# Altium PCB Control_Board_Model_C201_FFC_Sens_Conn.PcbDoc (part 9 of 12)
Units mil, origin at the board's own origin, x right, y up, seen from the top; angles counter-clockwise.
Board outline 3937.01 x 2755.91 mil, 6 copper layers (1-SIG-TOP, 2-GND, 3-PWR, 4-SIG-HOR, 5-SIG-VERT, 6-GND-BOT), stack 46.063 mil thick; 497 components, 379 nets, 1804 pads, 1610 vias.
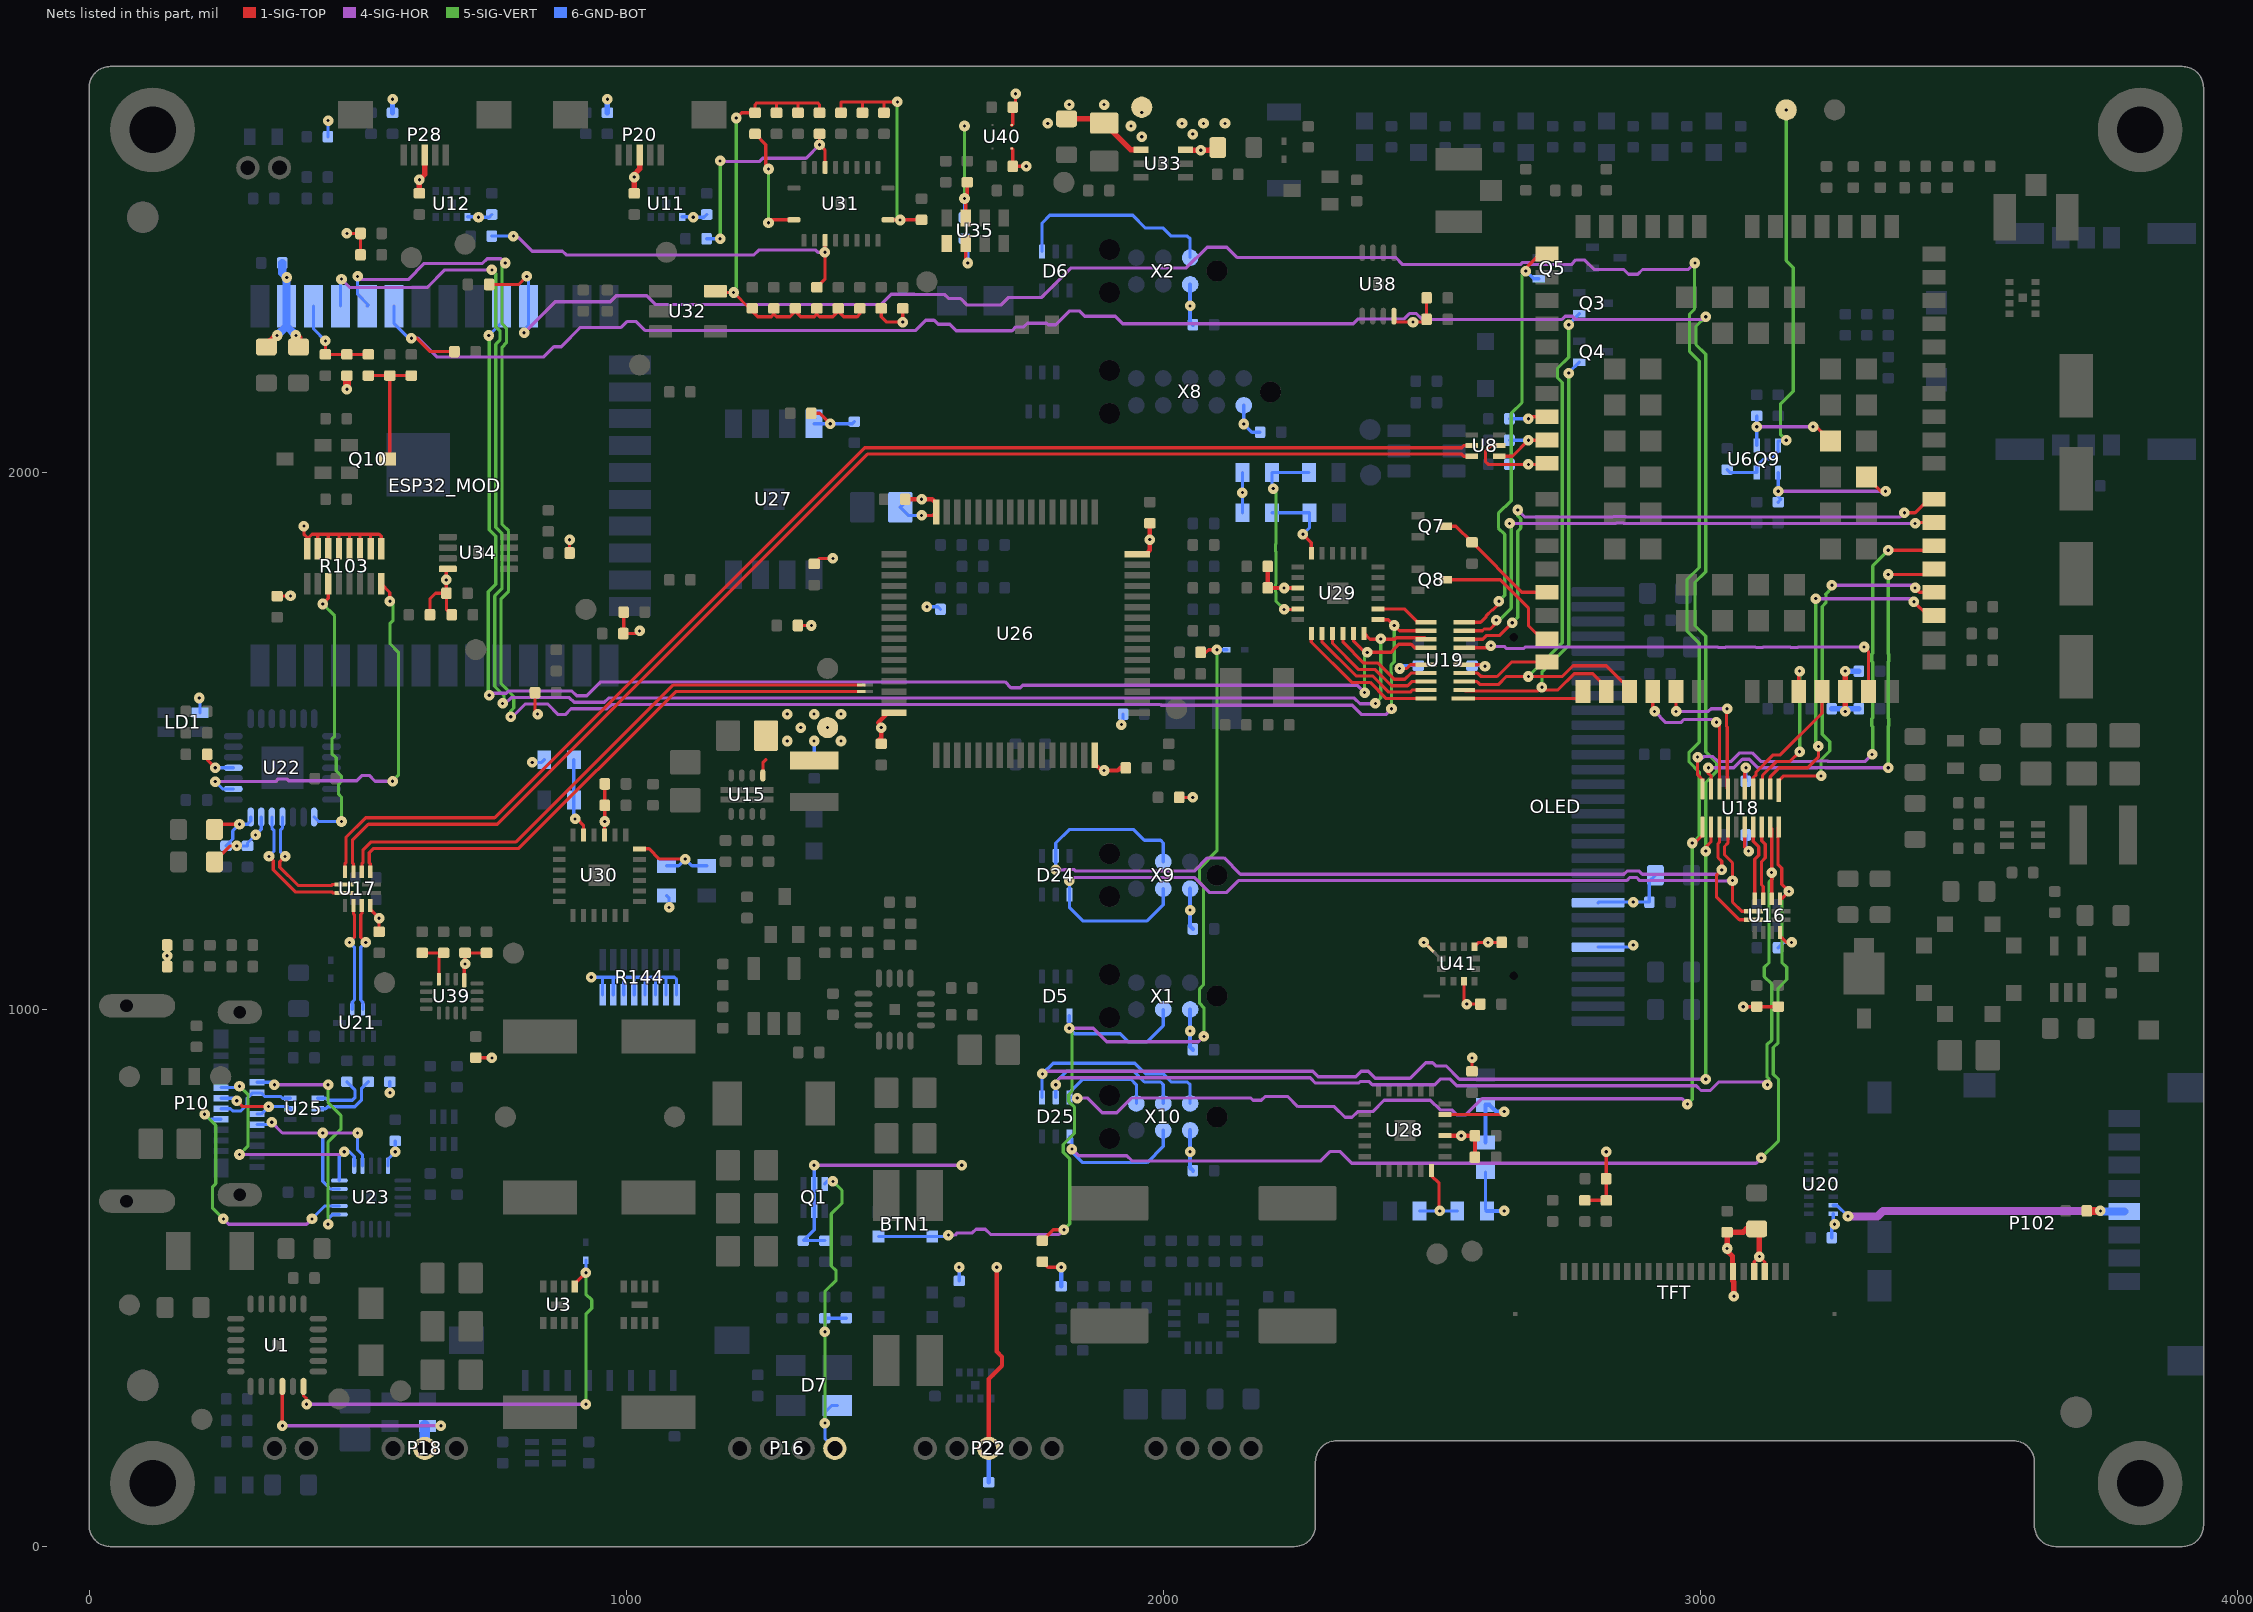
[diagram p8: the nets of this part, all layers, seen from the top]

## Via types
v1: diameter 19.68, hole 5.91, 1-SIG-TOP to 6-GND-BOT, tented both sides, 1553 vias
v2: diameter 23.81, hole 11.81, 1-SIG-TOP to 6-GND-BOT, tented both sides, 27 vias
v3: diameter 23.82, hole 11.81, 1-SIG-TOP to 6-GND-BOT, tented both sides, 26 vias
v4: diameter 21.65, hole 7.87, 1-SIG-TOP to 6-GND-BOT, tented both sides, 4 vias

## Nets (pads, with @x,y where several pads share a name; then routed paths per layer and width w, separated by ;. In a path a pad name is that pad's centre, name@x,y a point inside that pad or via, vN(x,y) a via of type N, cw(c..) or ccw(c..) an arc to the next point about the centre after c; other vN are vias at no path point) (continued)
+3V3: (continued)
  other v1: 2555,765 1300,1500 1400,1500 1325,1525 1375,1525 1300,1550 1350,1550 1400,1550 2055,2630 2035,2650 2075,2650 2115,2650
+3V3_AUX: C46.2 C47.2 C120.2 C123.1 C126.2 P20.3 P28.3 R145.2 R146.2 R147.2 R148.2 R149.2 R150.2 R151.1 R152.1 R153.1 R158.2 R159.1 TP12.1 U32.5 U33.1 U35.7 | length 1469.3
  1-SIG-TOP w6: U32.5@1166.18,2337.41 1168.59,2335 v1(1200,2335) 1229.69,2305.32 C120.2@1235,2305.32 1235,2300 1245,2290 1270,2290 1275,2295 ; v1(1205,2660) 1214.84,2669.84 1240,2669.84 1240,2685 1243,2688 1280,2688 ; R147.2@1275,2305.32 1275,2295 ; R146.2@1280,2669.68 1280,2688 ; R148.2@1315,2305.32 R148.2@1315,2300 ; R145.2@1320,2669.68 1320,2688 ; R153.1@1355,2305.32 1355,2295 ; R151.1@1360,2669.68 1360,2685 1357,2688 1320,2688 ; R149.2@1395,2305.32 R149.2@1395,2300 ; R150.2@1435,2305.32 1435,2295 1430,2290 1405,2290 R149.2@1395,2300 ; U35.7@1632.28,2473.62 1632.28,2507.72 v1(1630,2510) 1635,2515 C126.2@1635,2540.32 ; 1275,2295 1280,2290 1305,2290 R148.2@1315,2300 ; 1280,2688 1320,2688 ; R148.2@1315,2300 1325,2290 1350,2290 1355,2295 ; 1355,2295 1360,2290 1385,2290 R149.2@1395,2300
  1-SIG-TOP w10: C47.2@615,2519.68 v1(615,2545) 625,2555 P28.3@625,2590.94 ; C46.2@1015,2519.68 v1(1015,2550) 1015,2555 1025,2565 P20.3@1025,2590.94 ; C123.1@1820,2658.46 1881.97,2658.46 1939.84,2600.6 U33.1@1958.66,2600.6
  5-SIG-VERT w6: v1(1200,2335) 1205,2340 v1(1205,2660) ; v1(1630,2510) v1(1630,2645)
  6-GND-BOT w6: R159.1@1630,2474.68 v1(1630,2510)
  other v1: 1960,2625 1940,2645 1785,2650 1960,2670 1825,2685 1890,2685
\BG95_PWRKEY: C38.2 Q7.3 U6.15 | length 240.1
  1-SIG-TOP w6: Q7.3@2525.59,1900 2544.68,1900 C38.2@2575,1869.68 2667.72,1776.97 U6.15@2714.76,1776.97
\BG95_RESET: Q8.3 U6.17 | length 253.8
  1-SIG-TOP w6: Q8.3@2525.59,1800 2627.71,1800 2680,1747.71 2680,1715 2704.65,1690.35 U6.17@2714.76,1690.35
\CP2102_RST: R103.8 U22.9 | length 771.7
  1-SIG-TOP w6: R103.8@543.9,1792.5 560,1776.4 v1(560,1760)
  4-SIG-HOR w6: v1(234.94,1424.32) 347.17,1424.32 352.23,1429.38 367.77,1429.38 371.35,1425.8 498.46,1425.8 508.46,1435.8 521.54,1435.8 532.34,1425 v1(565,1425)
  5-SIG-VERT w6: v1(560,1760) 566,1754 566,1724.42 560.16,1718.57 560.16,1681.43 576,1665.58 576,1436 v1(565,1425)
  6-GND-BOT w6: v1(234.94,1424.32) 248.63,1410.63 U22.9@268.5,1410.63
\ESP32_RST: C40.2 ESP32_MOD.3 R59.1 R60.2 | length 179.1
  1-SIG-TOP w6: v1(440,2245) C40.2@440,2219.68 R60.2@480,2219.68 R59.1@520,2219.68
  6-GND-BOT w6: ESP32_MOD.3@417.91,2309.65 417.91,2267.09 v1(440,2245)
\I2C_S1_INT: R74.1 R151.2 U31.7 | length 435.2
  1-SIG-TOP w6: R151.2@1360,2630.32 v1(1360,2610) 1370.47,2599.53 U31.7@1370.47,2567.91
  4-SIG-HOR w6: v1(1175,2580) 1175.84,2579.16 1248.63,2579.16 1254.48,2585 1335,2585 v1(1360,2610)
  5-SIG-VERT w6: v1(1175,2435) v1(1175,2580)
  6-GND-BOT w6: R74.1@1149.69,2435 v1(1175,2435)
\I2C_S2_INT: R152.2 U31.11 | length 227
  1-SIG-TOP w6: R152.2@1240,2630.32 1260,2610.32 1260,2570 v1(1265,2565) ; v1(1265,2465) 1270.47,2470.47 U31.11@1312.4,2470.47
  5-SIG-VERT w6: v1(1265,2465) 1263,2467 1265,2469 v1(1265,2565)
\I2C_S3_INT: R75.1 R153.2 U31.14 | length 744
  1-SIG-TOP w6: R153.2@1355,2344.68 1370,2359.68 v1(1370,2410) 1370.47,2410.47 U31.14@1370.47,2432.09
  4-SIG-HOR w6: v1(790,2440) 785,2440 788,2437 799.97,2437 824.97,2412 881.42,2412 888.42,2405 1238.03,2405 1247.03,2414 1352.97,2414 1356.97,2410 v1(1370,2410)
  6-GND-BOT w6: R75.1@749.69,2440 v1(790,2440)
\INT: R159.2 U35.2 | length 86.4
  1-SIG-TOP w6: U35.2@1632.28,2426.38 1632.28,2392.28 1634.57,2390 v1(1635.91,2390)
  6-GND-BOT w6: R159.2@1630,2435.32 1635.91,2429.41 v1(1635.91,2390)
\RST: Q10.3 R59.2 R61.2 R95.2 | length 237.2
  1-SIG-TOP w6: R59.2@520,2180.32 R61.2@560,2180.32 ; Q10.3@555.43,2025.01 560,2029.57 R61.2@560,2180.32 ; R95.2@600,2180.32 R61.2@560,2180.32
\SBU_SW_EN: R122.1 R128.2 U39.4 | length 92.4
  1-SIG-TOP w6: R122.1@620,1105.32 R128.2@660,1105.32 651.38,1096.69 U39.4@651.38,1056.5
\STM32_RST: BTN1.1 D4.1 D5.1 R14.2 R132.1 X1.3 | length 2120.3
  1-SIG-TOP w6: R14.2@1775,569.68 1795.31,590 v1(1815,590) ; R132.1@2069.69,1665 2079.69,1665 2084.69,1670 v1(2100,1670)
  4-SIG-HOR w6: v1(1600,580) 1612.51,580 1616.51,584 1644.52,584 1651.37,590.84 1668.63,590.84 1678.32,581.16 1806.16,581.16 v1(1815,590) ; v1(1825,965) 1870,965 1895,940 2065.68,940 v1(2075.68,950)
  5-SIG-VERT w6: v1(1815,590) 1825.8,600.8 1825.8,721.87 1813.64,734.02 1813.64,748.64 1835,770 1835,817.66 1824.2,828.46 1824.2,841.54 1830,847.34 1830,960 v1(1825,965) ; v1(2075.68,950) 2075.68,1003.58 2067.66,1011.6 2067.66,1038.4 2075,1045.74 2075,1229.26 2067.66,1236.6 2067.66,1263.4 2100,1295.74 v1(2100,1670)
  6-GND-BOT w6: BTN1.1@1469.8,577.17 BTN1.1@1570.2,577.17 1597.83,577.17 1600,579.33 v1(1600,580) ; D5.1@1825.59,988.78 1825,988.19 v1(1825,965) 1835,955 1920,955 1935,940 1970,940 2000,970 X1.3@2000,1000 ; v1(2100,1670) D4.1@2118.46,1670
\SUSP_B: R106.1 U22.11 | length 64.8
  1-SIG-TOP w6: R106.1@219.69,1475 219.69,1465.32 v1(235,1450)
  6-GND-BOT w6: v1(235,1450) U22.11@268.5,1450
\UI_BAT_EN: D10.1 U1.12 U3.5 | length 868
  1-SIG-TOP w6: U1.12@399.21,298.82 U1.12@399.21,298.23 399.21,280.79 405,275 v1(405,265) ; U3.5@904.53,484.06 904.53,489.53 v1(925,510)
  4-SIG-HOR w6: v1(405,265) v1(925,265)
  5-SIG-VERT w6: v1(925,265) 925,432.66 935.8,443.46 935.8,459.2 925,470 v1(925,510)
  6-GND-BOT w6: v1(925,510) D10.1@925,533.46
A1_0: U6.19 U19.1 | length 228.5
  1-SIG-TOP w6: U19.1@2558.46,1579.13 2768.9,1579.13 U6.19@2781.69,1591.93
A1_1: Q4.1 U6.20 U19.2 | length 935.4
  1-SIG-TOP w6: U19.2@2560.43,1594.88 2562.32,1593 2698,1593 v1(2705,1600) 2710,1595 2735,1595 2765,1625 2800,1625 2825,1600 U6.20@2825,1591.93
  5-SIG-VERT w6: v1(2705,1600) 2705,1628.03 2755,1678.03 v1(2755,2185)
  6-GND-BOT w6: v1(2755,2185) 2755,2186.09 Q4.1@2774.41,2205.5
A1_2: Q3.1 U6.21 U19.3 | length 1069.4
  1-SIG-TOP w6: U19.3@2560.43,1610.63 2584.11,1610.63 2586.4,1608.33 2586.67,1608.33 2590,1605 2623.62,1605 2638.62,1620 v1(2680,1620) 2743.03,1620 2763.03,1640 2825,1640 2842.42,1622.58 2842.51,1622.58 2868.31,1596.78 U6.21@2868.31,1591.93
  5-SIG-VERT w6: v1(2680,1620) 2743,1683 2743,2167.52 2734.16,2176.37 2734.16,2193.63 2755,2214.48 v1(2755,2275)
  6-GND-BOT w6: v1(2755,2275) 2755,2276.09 Q3.1@2774.41,2295.5
A1_3: U6.18 U19.4 | length 168.2
  1-SIG-TOP w6: U19.4@2560.43,1626.38 2585.33,1626.38 2591.37,1620.33 2593.02,1620.33 2593.35,1620 2621.65,1620 2648.69,1647.05 U6.18@2714.76,1647.05
A1_4: U6.30 U19.7 | length 838.1
  1-SIG-TOP w6: U19.7@2560.43,1673.62 2605.94,1673.62 v1(2610,1677.68) ; v1(3305,1675) 3313.19,1666.81 U6.30@3313.19,1591.93
  4-SIG-HOR w6: v1(2610,1677.68) 2611.65,1676.04 2635,1676.04 2638.84,1672.2 2671.16,1672.2 2673.96,1675 3032.66,1675 3033.46,1674.2 3046.54,1674.2 3047.34,1675 3102.66,1675 3103.46,1674.2 3116.54,1674.2 3117.34,1675 3167.66,1675 3168.46,1674.2 3181.54,1674.2 3182.34,1675 v1(3305,1675)
A1_5: U6.39 U19.8 | length 1116.3
  1-SIG-TOP w6: U19.8@2560.43,1689.37 2595.04,1689.37 2602.2,1696.53 2626.53,1696.53 v1(2650,1720) ; v1(3380,1925) 3400,1925 3425.2,1950.2 U6.39@3435.24,1950.2
  4-SIG-HOR w6: v1(2660,1930) 2673,1917 2837.69,1917 2838.49,1917.8 2861.51,1917.8 2862.31,1917 3372,1917 v1(3380,1925)
  5-SIG-VERT w6: v1(2650,1720) 2660,1730 2660,1890.52 2665.84,1896.37 2665.84,1913.63 2660,1919.48 v1(2660,1930)
A1_6: U6.38 U19.9 | length 1058.5
  1-SIG-TOP w6: U19.9@2560.43,1705.12 2593.82,1705.12 2597.22,1708.53 2608.53,1708.53 2620,1720 v1(2620,1725) ; v1(3400,1905) 3401.89,1906.89 U6.38@3435.24,1906.89
  4-SIG-HOR w6: v1(2645,1905) 2842.66,1905 2843.46,1905.8 2856.54,1905.8 2857.34,1905 v1(3400,1905)
  5-SIG-VERT w6: v1(2620,1725) 2625.52,1725 2648,1747.48 2648,1902 v1(2645,1905)
A1_7: Q5.1 U6.1 U19.10 | length 816.5
  1-SIG-TOP w6: U19.10@2560.43,1720.87 2590.87,1720.87 2601.16,1731.16 2601.16,1732.8 2612.2,1743.84 2613.84,1743.84 2625,1755 v1(2625,1760) ; v1(2675,2375) 2675,2380 2701.89,2406.89 U6.1@2714.76,2406.89
  5-SIG-VERT w6: v1(2625,1760) 2636,1771 2636,1884.52 2624.16,1896.37 2624.16,1923.63 2648,1947.48 2648,2109.97 2668,2129.97 2668,2368 v1(2675,2375)
  6-GND-BOT w6: v1(2675,2375) 2689.5,2360.5 Q5.1@2699.41,2360.5
A2_0: U6.35 U18.1 | length 671.1
  1-SIG-TOP w6: U18.1@3145.87,1408.46 3145.87,1425.87 3155,1435 v1(3225,1435) ; v1(3400,1785) 3408.03,1776.97 U6.35@3435.24,1776.97
  4-SIG-HOR w6: v1(3245,1790) 3395,1790 v1(3400,1785)
  5-SIG-VERT w6: v1(3225,1435) 3225,1465.52 3240.84,1481.37 3240.84,1498.63 3227,1512.48 3227,1750.37 3233.83,1757.2 3233.83,1772.8 3233.31,1773.31 3245,1785 v1(3245,1790)
A2_1: U6.34 U18.2 | length 658.1
  1-SIG-TOP w6: U18.2@3130.12,1410.43 3130.12,1433.15 3146.97,1450 3200,1450 3220,1470 v1(3220,1490) ; v1(3397.74,1759.32) 3423.39,1733.66 U6.34@3435.24,1733.66
  4-SIG-HOR w6: v1(3215,1765) 3392.06,1765 v1(3397.74,1759.32)
  5-SIG-VERT w6: v1(3215,1765) 3215,1495 v1(3220,1490)
A2_2: U6.27 U18.3 | length 302.3
  1-SIG-TOP w6: U18.3@3114.37,1410.43 3115.84,1411.91 3115.84,1435.84 3142,1462 3167,1462 v1(3185,1480) ; U6.27@3183.27,1591.93 3183.27,1628.27 v1(3185,1630)
  5-SIG-VERT w6: v1(3185,1480) v1(3185,1630)
A2_3: U6.28 U18.4 | length 242.3
  1-SIG-TOP w6: U18.4@3098.62,1410.43 3098.62,1431.97 3103.84,1437.2 3103.84,1442.2 3135.65,1474 3149,1474 3226.57,1551.57 U6.28@3226.57,1591.93
A2_4: U6.23 U18.7 | length 286.3
  1-SIG-TOP w6: U6.23@2954.92,1591.93 2955,1591.85 v1(2955,1555) ; v1(3050,1560) 3050,1555 3051.38,1553.62 3048.84,1551.09 3048.84,1527.2 3050,1526.04 3050,1411.81 U18.7@3051.38,1410.43
  4-SIG-HOR w6: v1(2955,1555) 3015,1555 3020,1560 v1(3050,1560)
A2_5: U6.22 U18.8 | length 293.4
  1-SIG-TOP w6: U6.22@2911.61,1591.93 2911.61,1558.39 v1(2915,1555) ; v1(3030,1535) 3035.63,1529.37 U18.8@3035.63,1410.43
  4-SIG-HOR w6: v1(2915,1555) 2935.84,1534.16 2963.63,1534.16 2969.48,1540 3025,1540 v1(3030,1535)
A2_6: U6.36 U18.9 | length 841.1
  1-SIG-TOP w6: v1(3015,1450) 3015,1440 3019.88,1435.12 U18.9@3019.88,1410.43 ; v1(3350,1810) 3424.96,1810 U6.36@3435.24,1820.28
  4-SIG-HOR w6: v1(3015,1450) 3062.66,1450 3078.46,1465.8 3091.54,1465.8 3107.34,1450 3217.66,1450 3218.46,1450.8 3231.54,1450.8 3232.34,1450 v1(3350,1450)
  5-SIG-VERT w6: v1(3350,1450) 3350,1527.66 3350.8,1528.46 3350.8,1541.54 3350,1542.34 3350,1647.66 3350.8,1648.46 3350.8,1661.54 3350,1662.34 v1(3350,1810)
A2_7: U6.37 U18.10 | length 900.8
  1-SIG-TOP w6: v1(2995,1470) 2995,1436.73 3005,1426.73 3004.13,1425.87 U18.10@3004.13,1410.43 ; v1(3350,1855) 3426.65,1855 U6.37@3435.24,1863.58
  4-SIG-HOR w6: v1(2995,1470) 3000.26,1464.74 3006.37,1470.84 3023.63,1470.84 3032.48,1462 3057.69,1462 3073.49,1477.8 3096.51,1477.8 3112.31,1462 3212.69,1462 3213.49,1462.8 3236.51,1462.8 3237.31,1462 3307,1462 v1(3320,1475)
  5-SIG-VERT w6: v1(3320,1475) 3321.05,1476.05 3321.05,1526.61 3319.2,1528.46 3319.2,1541.54 3321.05,1543.39 3321.05,1646.61 3319.2,1648.46 3319.2,1661.54 3321.05,1663.39 3321.05,1826.05 v1(3350,1855)
B1_0: U19.20 U29.1 | length 273.4
  1-SIG-TOP w6: U29.1@2275.79,1700.2 2275.79,1684.21 2351,1609 2385.09,1609 2415.09,1579 2464.91,1579 2465.05,1579.13 U19.20@2489.57,1579.13
B1_1: U19.19 U29.2 | length 250.1
  1-SIG-TOP w6: U29.2@2295.47,1700.2 2295.47,1684.53 2359,1621 2390.06,1621 2420.06,1591 2459.94,1591 2463.82,1594.88 U19.19@2489.57,1594.88
B1_2: U19.18 U29.3 | length 228.6
  1-SIG-TOP w6: U29.3@2315.16,1700.2 2315.16,1681.81 2363.97,1633 2395.03,1633 2425.03,1603 2454.97,1603 2462.6,1610.63 U19.18@2489.57,1610.63
B1_3: U19.17 U29.4 | length 204.5
  1-SIG-TOP w6: U29.4@2334.84,1700.2 2334.84,1683.51 2373.35,1645 2400,1645 2430,1615 2450,1615 2461.38,1626.38 U19.17@2489.57,1626.38
B1_4: ESP32_MOD.10 U19.14 U29.5 | length 2651.5
  1-SIG-TOP w6: U29.5@2354.53,1700.2 2354.53,1685.47 2375,1665 v1(2380,1665) 2425,1665 2426.98,1666.98 2426.98,1668.63 2438.54,1680.18 2461.46,1680.18 2468.03,1673.62 U19.14@2489.57,1673.62
  4-SIG-HOR w6: v1(745,1585) 748.83,1588.83 776.86,1588.83 780.82,1592.8 899.18,1592.8 907.97,1584 926.66,1584 952.66,1610 1705.52,1610 1716.37,1599.16 1733.63,1599.16 1738.43,1603.95 2361.05,1603.95 v1(2375,1590)
  5-SIG-VERT w6: v1(744.09,2255) 745,2254.09 745,1893.17 757,1881.17 757,1792 743.16,1778.16 743.16,1586.84 v1(745,1585) ; v1(2375,1590) 2375,1660 v1(2380,1665)
  6-GND-BOT w6: v1(744.09,2255) 767.91,2278.82 ESP32_MOD.10@767.91,2309.65
B1_5: ESP32_MOD.4 U19.13 U29.6 | length 3074.7
  1-SIG-TOP w6: U29.6@2374.21,1700.2 2385.04,1689.37 2430.75,1689.37 2433.57,1692.18 2486.75,1692.18 U19.13@2489.57,1689.37
  4-SIG-HOR w6: v1(470,2360) 485.8,2344.2 629.2,2344.2 662.16,2377.16 v1(750,2377.16) ; v1(770,1570) 775,1570 785.8,1580.8 894.2,1580.8 903,1572 959.34,1572 967.16,1579.82 1975.79,1579.82 1976.12,1580.16 1999.15,1580.16 1999.49,1579.82 2355.71,1579.82 2366.37,1569.16 2394.16,1569.16 v1(2395,1570)
  5-SIG-VERT w6: v1(750,2377.16) 757,2370.16 757,2271.57 764.94,2263.63 764.94,2246.37 757,2238.43 757,1898.14 769,1886.14 769,1784 755.16,1770.16 755.16,1601.47 772.5,1584.13 772.5,1572.5 v1(770,1570) ; v1(2395,1570) 2405,1580 v1(2405,1690)
  6-GND-BOT w6: ESP32_MOD.4@467.91,2309.65 467.91,2357.91 v1(470,2360)
B1_6: ESP32_MOD.5 U19.12 U29.7 | length 3172.6
  1-SIG-TOP w6: U29.7@2399.8,1725.79 2419.21,1725.79 v1(2430,1715) 2439.88,1705.12 U19.12@2489.57,1705.12
  4-SIG-HOR w6: v1(500,2365) 505.84,2359.16 594.16,2359.16 624.16,2389.16 732.52,2389.16 741.37,2398 767,2398 v1(775,2390) ; v1(785,1545) 788.31,1545 812.11,1568.8 853.87,1568.8 873.46,1549.2 886.54,1549.2 897.34,1560 964.31,1560 972.13,1567.82 1980.76,1567.82 1981.1,1568.16 1994.18,1568.16 1996.02,1566.32 2352.24,1566.32 2369.4,1549.16 2414.16,1549.16 v1(2425,1560)
  5-SIG-VERT w6: v1(775,2390) 769,2384 769,2276.54 776.94,2268.6 776.94,2241.4 769,2233.46 769,1903.11 781,1891.11 781,1779.03 767.16,1765.19 767.16,1606.44 790.84,1582.75 790.84,1561.37 785,1555.52 v1(785,1545) ; v1(2425,1560) 2425,1627.66 2424.2,1628.46 2424.2,1641.54 2430,1647.34 v1(2430,1715)
  6-GND-BOT w6: v1(500,2365) 500,2331.73 520,2311.73 ESP32_MOD.5@517.91,2309.65
B1_7: U19.11 U29.8 | length 100
  1-SIG-TOP w6: U29.8@2399.8,1745.47 2449.53,1745.47 2474.13,1720.87 U19.11@2489.57,1720.87
B2_0: D25.1 U16.3 U18.20 X10.3 | length 2247.9
  1-SIG-TOP w6: U18.20@3145.87,1339.57 3144.84,1338.54 3144.84,1269.65 3151.68,1262.8 3151.68,1233.32 v1(3165,1220) 3151.5,1206.5 U16.3@3148.62,1206.5
  4-SIG-HOR w6: v1(1830,740) 1842.34,727.66 1932.34,727.66 1941.84,718.16 2293.68,718.16 2311.37,735.84 2328.63,735.84 2350.63,713.84 3103.84,713.84 v1(3113.59,723.59)
  5-SIG-VERT w6: v1(3113.59,723.59) 3145.84,755.84 3145.84,869.68 3136,879.52 3136,929.29 3144.84,938.13 3144.84,1039.84 3160.84,1055.84 3160.84,1078.63 3152,1087.48 3152,1207 v1(3165,1220)
  6-GND-BOT w6: D25.1@1825.59,763.78 1830,759.37 v1(1830,740) 1830,735 1850,715 1970,715 2000,745 X10.3@2000,775
B2_1: D25.5 U16.4 U18.19 X10.4 | length 2192.6
  1-SIG-TOP w6: U18.19@3130.12,1339.57 3132.84,1336.84 v1(3132.84,1255) U16.4@3132.84,1206.53
  4-SIG-HOR w6: v1(1800,860) 1800,865 1807.84,872.84 2273.6,872.84 2283.49,862.95 2363.48,862.95 2366.37,865.84 2383.63,865.84 2389.48,860 2505.52,860 2516.37,870.84 2533.63,870.84 2546.48,858 2992.52,858 3001.37,849.16 3018.63,849.16 3034.48,865 3120,865 v1(3125,860)
  5-SIG-VERT w6: v1(3125,860) 3128,863 3128,870.55 3124,874.55 3124,934.26 3132.84,943.1 3132.84,1047.68 3119.16,1061.37 3119.16,1078.63 3128,1087.48 3128,1237.65 3132.84,1242.49 v1(3132.84,1255)
  6-GND-BOT w6: D25.5@1800,836.22 v1(1800,860) 1800,865 1820,885 1945,885 1965,865 1995,865 2000,860 X10.4@2000,825
B2_2: U16.5 U18.18 | length 139.9
  1-SIG-TOP w6: U18.18@3114.37,1339.57 3114.37,1314.25 3120.84,1307.78 3120.84,1282.22 3114,1275.38 3114,1232.2 3117.13,1229.07 U16.5@3117.13,1206.5
B2_3: U16.6 U18.17 | length 140.4
  1-SIG-TOP w6: U18.17@3098.62,1339.57 3098.62,1313.03 3108.84,1302.8 3108.84,1287.2 3101.38,1279.73 U16.6@3101.38,1206.5
B2_4: D24.1 U16.7 U18.14 X9.3 | length 1736.4
  1-SIG-TOP w6: U18.14@3051.38,1339.57 3051.38,1309.88 3045,1303.5 3045,1287.89 3060,1272.89 v1(3060,1240) 3060,1200 3077.13,1182.87 U16.7@3099.41,1182.87
  4-SIG-HOR w6: v1(1825,1240) 1830.66,1245.66 2058.6,1245.66 2086.6,1217.66 2117.66,1217.66 2140,1240 2862.66,1240 2868.46,1245.8 2881.54,1245.8 2887.34,1240 3030.52,1240 3031.37,1239.16 3048.63,1239.16 3049.48,1240 v1(3060,1240)
  6-GND-BOT w6: v1(1825,1240) 1825.59,1239.41 D24.1@1825.59,1213.78 1825.59,1189.41 1850,1165 1970,1165 2000,1195 X9.3@2000,1225
B2_5: D24.5 U16.8 U18.13 X9.4 | length 1803.2
  1-SIG-TOP w6: U18.13@3035.63,1339.57 3035.63,1311.1 3033,1308.47 3033,1282.92 3040,1275.92 v1(3040,1260) 3030,1250 3030,1210 3072.87,1167.13 U16.8@3099.41,1167.13
  4-SIG-HOR w6: v1(1800,1260) 1815.52,1260 1816.37,1260.84 1833.63,1260.84 1836.82,1257.66 2057.66,1257.66 2082.34,1282.34 2113.4,1282.34 2143.74,1252 2857.69,1252 2863.49,1257.8 2886.51,1257.8 2892.31,1252 3032,1252 v1(3040,1260)
  6-GND-BOT w6: v1(1800,1260) D24.5@1800,1286.22 1800,1310 1825,1335 1945,1335 1965,1315 1995,1315 2000,1310 X9.4@2000,1275
B2_6: D25.4 ESP32_MOD.6 R73.2 U18.12 X10.2 | length 5859.1
  1-SIG-TOP w6: v1(600,2250) 610,2250 635,2225 R73.2@680.31,2225 ; v1(3010,1295) 3010,1302.44 3019.88,1312.33 U18.12@3019.88,1339.57
  4-SIG-HOR w6: v1(600,2250) 612.51,2250 647.35,2215.16 846.52,2215.16 865.52,2234.16 879.16,2234.16 915,2270 990.52,2270 1001.37,2280.84 1018.63,2280.84 1034.96,2264.51 1508.15,2264.51 1508.46,2264.2 1521.54,2264.2 1521.85,2264.51 1539.06,2264.51 1557.79,2283.24 1573.39,2283.24 1580.8,2275.83 1602.77,2275.83 1614.6,2264 1718.61,2264 1725.61,2271 1740.43,2271 1747.26,2277.83 1782.74,2277.83 1785.57,2275 1800,2275 1825.84,2300.84 1843.63,2300.84 1853.82,2290.66 1910.97,2290.66 1924.63,2277 2353.97,2277 2362.81,2285.84 2448.5,2285.84 2458.46,2295.8 2471.54,2295.8 2482.34,2285 2742.66,2285 2748.46,2290.8 2761.54,2290.8 2767.34,2285 3005,2285 v1(3010,2290) ; v1(1775,880) 1779.84,884.84 2278.57,884.84 2288.46,874.95 2358.51,874.95 2368.55,885 2381.97,885 2394.97,872 2459.66,872 2488.46,900.8 2501.54,900.8 2507.34,895 2526.45,895 2551.45,870 v1(3010,870)
  5-SIG-VERT w6: v1(3010,870) v1(3010,1295) 3010,1422.66 3030.8,1443.46 3030.8,1459.2 3010,1480 3010,1695 2990,1715 2990,1795 3010,1815 3010,2220 2992,2238 2992,2272 v1(3010,2290)
  6-GND-BOT w6: ESP32_MOD.6@567.91,2309.65 567.91,2277.09 595,2250 v1(600,2250) ; D25.4@1774.41,836.22 1774.41,879.41 v1(1775,880) 1795,900 1946.97,900 1966.97,880 2000,880 2015,865 2045,865 2050,860 X10.2@2050,825
B2_7: D25.6 ESP32_MOD.11 R72.2 U18.11 X10.6 | length 5598.9
  1-SIG-TOP w6: R72.2@744.69,2350 800,2350 v1(815,2365) ; v1(2985,1310) 2990,1310 3004.13,1324.13 U18.11@3004.13,1339.57
  4-SIG-HOR w6: v1(810,2260) 868,2318 970.64,2318 981.48,2328.84 1038.52,2328.84 1054.85,2312.51 1474.26,2312.51 1493.55,2331.8 1536.45,2331.8 1537.01,2331.24 1593.27,2331.24 1600.68,2323.83 1622.65,2323.83 1634.48,2312 1698.73,2312 1712.56,2325.83 1773.86,2325.83 1828.86,2380.83 2043.12,2380.83 2081.63,2419.34 2118.37,2419.34 2137.28,2400.43 2432.42,2400.43 2445.85,2387 2664.66,2387 2668.46,2390.8 2681.54,2390.8 2685.34,2387 2759.66,2387 2768.46,2395.8 2784.2,2395.8 2802.16,2377.84 2857.68,2377.84 2866.37,2369.16 2883.63,2369.16 2892.32,2377.84 2977.84,2377.84 v1(2990,2390) ; v1(1840,835) 1859.26,835 1886.6,807.66 1913.4,807.66 1940.74,835 2163.37,835 2167.2,831.17 2182.8,831.17 2189.63,838 2232,838 2250.84,819.16 2318.5,819.16 2338.46,799.2 2351.54,799.2 2362.34,810 2390,810 2411,831 2497.55,831 2515.55,813 2537.52,813 2546.37,804.16 2563.63,804.16 2593.32,833.84 2966.16,833.84 v1(2976.05,823.95)
  5-SIG-VERT w6: v1(2976.05,823.95) 2985,832.91 v1(2985,1310) 2998,1323 2998,1442 2979.2,1460.8 2979.2,1479.2 2998,1498 2998,1682 2975,1705 2975,1800 2998,1823 2998,2207 2980,2225 2980,2295 2989.16,2304.16 2989.16,2389.16 v1(2990,2390)
  6-GND-BOT w6: v1(810,2260) 810,2265 817.91,2272.91 ESP32_MOD.11@817.91,2309.65 v1@817.91,2365 ; v1(815,2365) v1@817.91,2365 ; v1(1840,835) 1842.56,835 1843.78,836.22 D25.6@1825.59,836.22 1825.59,845.59 1850,870 1940,870 1950,860 X10.6@1950,825 ; v1@817.91,2365 817.91,2367.91 820,2365.83 819.17,2365 v1@817.91,2365
BATSNS: D3.1 P18.2 U1.10 | length 441.8
  1-SIG-TOP w6: U1.10@359.84,298.82 U1.10@359.84,298.23 359.84,225.16 v1(360,225)
  4-SIG-HOR w6: v1(360,225) v1(655,225)
  6-GND-BOT w6: D3.1@625,225.39 654.61,225.39 v1(655,225)
  6-GND-BOT w20: P18.2@625,182.68 D3.1@625,225.39
BG95_PON_TRIG: Q9.4 R57.1 U6.96 | length 203.6
  1-SIG-TOP w6: v1(3210,2085) 3215.79,2085 U6.96@3242.32,2058.46
  4-SIG-HOR w6: v1(3105,2085) v1(3210,2085)
  6-GND-BOT w6: R57.1@3105,2105.32 3105.32,2105 Q9.4@3105.32,2050.2
BG95_USB_BOOT: Q9.1 R55.1 U6.75 | length 310.5
  1-SIG-TOP w6: U6.75@3309.25,1991.54 3335.79,1965 v1(3345,1965)
  4-SIG-HOR w6: v1(3145,1965) 3335,1965 3340,1960 v1(3345,1965)
  6-GND-BOT w6: Q9.1@3144.68,1999.8 3145,1999.49 v1(3145,1965) 3145,1955.32 3150,1950.32 3144.68,1945 R55.1@3145,1944.68
BG95_USB_D_N: R41.1 U6.10 U8.2 | length 202.8
  1-SIG-TOP w6: U8.2@2625.59,2050 2610,2050 2600,2040 2600,2020 2605,2015 v1(2680,2015) 2712.64,2015 U6.10@2714.76,2017.13
  6-GND-BOT w6: R41.1@2644.68,2015 v1(2680,2015)
BG95_USB_D_P: R40.1 U6.9 U8.1 | length 137
  1-SIG-TOP w6: U8.1@2625.59,2030.32 2650.32,2030.32 v1(2680,2060) 2714.33,2060 U6.9@2714.76,2060.43
  6-GND-BOT w6: R40.1@2644.68,2060 v1(2680,2060)
BG95_USB_VBUS: R39.1 U6.8 | length 71.6
  1-SIG-TOP w6: v1(2680,2100) 2683.74,2103.74 U6.8@2714.76,2103.74
  6-GND-BOT w6: R39.1@2644.68,2100 v1(2680,2100)
CLKOUT: U35.1
CMC_D_N: R127.1 U25.1 | length 108.8
  6-GND-BOT w6: U25.1@425.59,834.68 440.4,834.68 444.24,830.84 490,830.84 495,835.84 495,850.32 R127.1@480,865.32
CMC_D_P: R126.1 U25.2 | length 127.8
  6-GND-BOT w6: U25.2@425.59,815 440.4,815 444.24,818.84 494.97,818.84 507,830.87 507,852.32 R126.1@520,865.32
CONN_CC1: P10.A5 U23.4 U23.7 | length 389.1
  4-SIG-HOR w6: v1(340,790) 360,770 v1(435,770) v1(500,770)
  6-GND-BOT w6: P10.A5@312.6,785.63 335.63,785.63 v1(340,790) ; v1(435,770) 435,680 449.25,665.75 U23.4@465.94,665.75 ; v1(500,770) 500,738.35 509.25,729.1 U23.7@509.25,709.06
CONN_CC2: P10.B5 U23.5 U23.6 | length 470.5
  4-SIG-HOR w6: v1(280,730) 470,730 v1(475,735)
  5-SIG-VERT w6: v1(280,730) 295.95,745.95 295.95,841.09 v1(280,857.05)
  6-GND-BOT w6: P10.B5@245.67,854.53 279.53,854.53 280,855 v1(280,857.05) ; U23.5@465.94,681.5 465.94,725.94 v1(475,735) 484.85,735 493.5,726.35 U23.6@493.5,709.06
CONN_D_N: P10.A7 P10.B7 U25.6 | length 155.2
  6-GND-BOT w6: P10.B7@245.67,815.16 263.2,815.16 267.2,811.16 282.8,811.16 293.84,822.2 293.84,833.84 304.69,844.68 P10.A7@312.6,844.68 320.31,844.68 326.98,838.02 356.98,838.02 360.31,834.68 U25.6@374.41,834.68
CONN_D_P: P10.A6 P10.B6 U25.5 | length 164.7
  1-SIG-TOP w6: v1(275,830) 285.82,819.18 v1(334.18,819.18)
  6-GND-BOT w6: P10.B6@245.67,834.84 269.84,834.84 275,829.68 v1(275,830) ; P10.A6@312.6,805.32 320.31,805.32 v1(334.18,819.18) 370.23,819.18 U25.5@374.41,815
CONN_SBU1: P10.A8 U23.1 | length 448.4
  4-SIG-HOR w6: v1(345,860) v1(445,860)
  5-SIG-VERT w6: v1(445,600) 445,753.37 468.83,777.2 468.83,802.8 445,826.63 v1(445,860)
  6-GND-BOT w6: P10.A8@312.6,864.37 340.63,864.37 v1(345,860) ; v1(445,600) 445,610 453.5,618.5 U23.1@465.94,618.5
CONN_SBU2: P10.B8 U23.2 | length 483.2
  4-SIG-HOR w6: v1(250,610) 260,600 405,600 v1(415,610)
  5-SIG-VERT w6: v1(215,805) 235.8,784.2 235.8,675.8 230,670 230,630 v1(250,610)
  6-GND-BOT w6: v1(215,805) 224.53,795.47 P10.B8@245.67,795.47 ; v1(415,610) 439.25,634.25 U23.2@465.94,634.25
CTRL: D7.2 P16.4 Q1.3 R23.2 R26.2 | length 663.6
  5-SIG-VERT w6: v1(1370,230) v1(1370,400) 1370,475 1390.84,495.84 1390.84,513.63 1382,522.48 1382,619.37 1401.83,639.2 1401.83,663.17 v1(1385,680)
  6-GND-BOT w6: Q1.3@1369.69,675.2 1374.49,680 v1(1385,680) ; v1(1370,400) R23.2@1370,425.32 R26.2@1410,425.32 ; P16.4@1388.58,182.68 1370,201.26 v1(1370,230) 1370,250 1382.6,262.6 D7.2@1393.31,262.6
D1_USB_MUX_N: NT2.2 U17.4 | length 1096.5
  1-SIG-TOP w6: U17.4@507.87,1256.5 507.87,1271.31 509.75,1273.18 509.75,1296.72 525.03,1312 795,1312 1087,1604 NT2.2@1438,1604
D1_USB_MUX_P: NT1.2 U17.3 | length 1076.6
  1-SIG-TOP w6: U17.3@523.62,1256.5 523.62,1271.31 521.75,1273.18 521.75,1291.75 530,1300 799.97,1300 1091.97,1592 NT1.2@1438,1592
D2_USB_MUX_N: U8.5 U17.6 | length 2462.9
  1-SIG-TOP w6: U17.6@476.38,1256.5 476.38,1271.31 478.25,1273.18 478.25,1320.22 515.03,1357 755,1357 1444.16,2046.16 2555.76,2046.16 2559.6,2050 U8.5@2574.41,2050
D2_USB_MUX_P: U8.6 U17.5 | length 2443.1
  1-SIG-TOP w6: U17.5@492.13,1256.5 492.13,1271.31 490.25,1273.18 490.25,1315.25 520,1345 759.97,1345 1449.13,2034.16 2555.76,2034.16 2559.6,2030.32 U8.6@2574.41,2030.32
D3_USB_MUX_N: U17.8 U22.5 | length 256.3
  1-SIG-TOP w6: v1(335,1285) 343,1277 343,1260.03 384.03,1219 451.82,1219 453.69,1217.13 U17.8@474.41,1217.13
  6-GND-BOT w6: v1(335,1285) 344.16,1294.16 344.16,1333.94 340.31,1337.78 U22.5@340.31,1358.5
D3_USB_MUX_P: U17.7 U22.4 | length 237.2
  1-SIG-TOP w6: v1(365,1285) 355,1275 355,1265 389,1231 451.82,1231 453.69,1232.87 U17.7@474.41,1232.87
  6-GND-BOT w6: U22.4@360,1358.5 360,1337.78 356.16,1333.94 356.16,1293.84 v1(365,1285)
D_N: U17.10 U21.2 | length 203.3
  1-SIG-TOP w6: v1(485,1125) 494,1134 494,1176.82 492.13,1178.69 U17.10@492.13,1193.5
  6-GND-BOT w6: v1(485,1125) 494,1116 494,1017.67 490.16,1013.83 U21.2@490.16,1000
D_P: U17.11 U21.3 | length 203.3
  1-SIG-TOP w6: U17.11@507.87,1193.5 507.87,1178.69 506,1176.82 506,1134 v1(515,1125)
  6-GND-BOT w6: U21.3@509.84,1000 509.84,1013.83 506,1017.67 506,1116 v1(515,1125)
DCD: R103.3 U22.1 | length 524.8
  1-SIG-TOP w6: v1(435,1755) 445.47,1765.47 R103.3@445.47,1792.5
  5-SIG-VERT w6: v1(435,1755) 457.16,1732.84 457.16,1508.6 452.16,1503.6 452.16,1476.4 460,1468.55 460,1444.2 470,1434.2 470,1424.48 464.16,1418.63 464.16,1401.37 470,1395.52 v1(470,1350)
  6-GND-BOT w6: U22.1@419.06,1358.5 427.56,1350 v1(470,1350)
DEBUG.CTS/TMS: D6.4 X2.2 | length 387.9
  6-GND-BOT w6: D6.4@1774.41,2411.22 1774.41,2464.41 1788.84,2478.84 1943.13,2478.84 1966.97,2455 2000,2455 2015,2440 2045,2440 2050,2435 X2.2@2050,2400